# EAGLE board controller v4 (EAGLE 9.7.0)
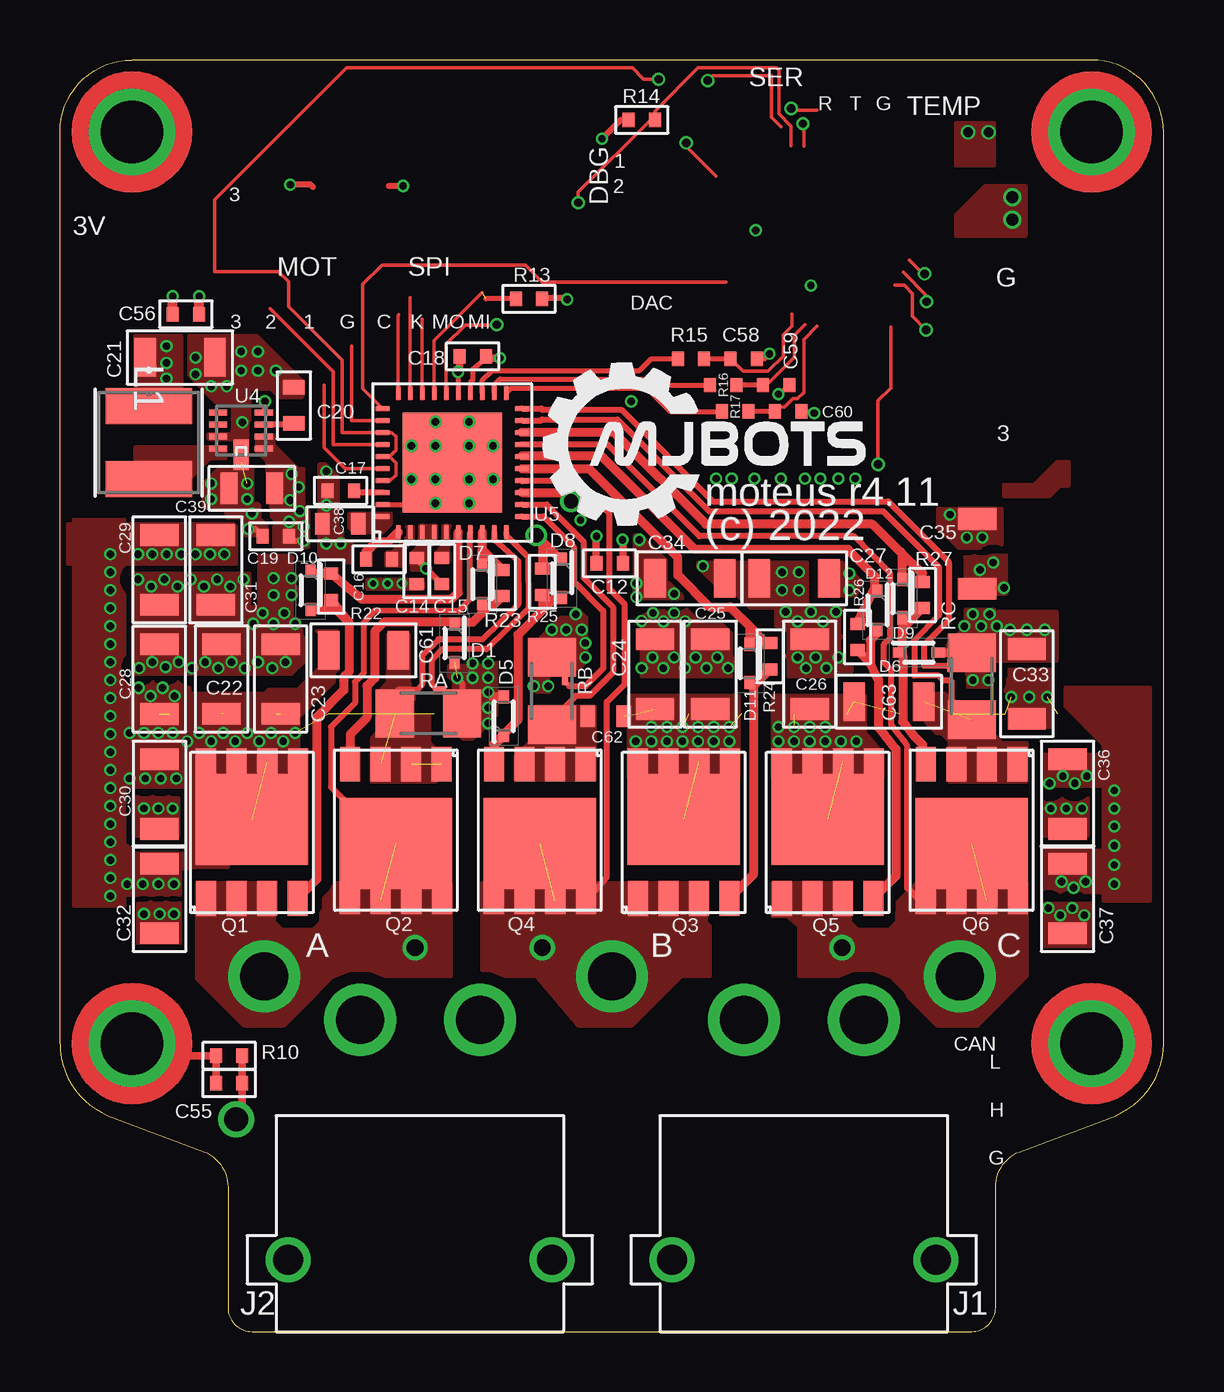
[diagram p0: board, top side]
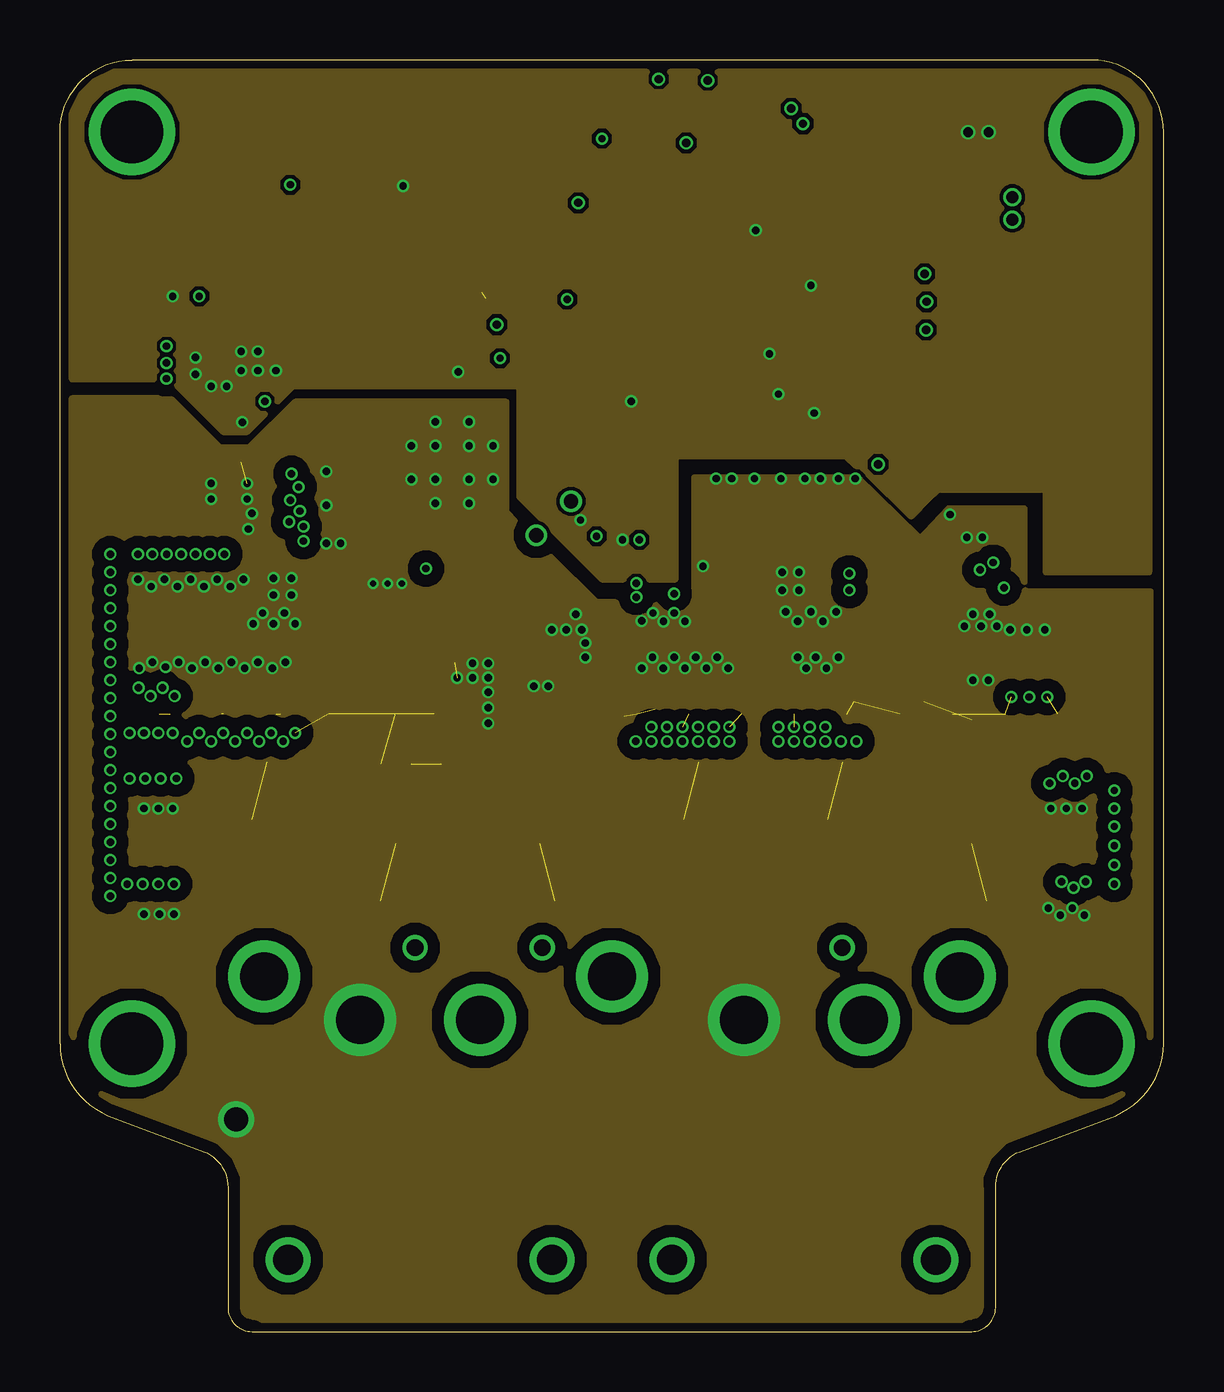
[diagram p1: board, inner layer Route2]
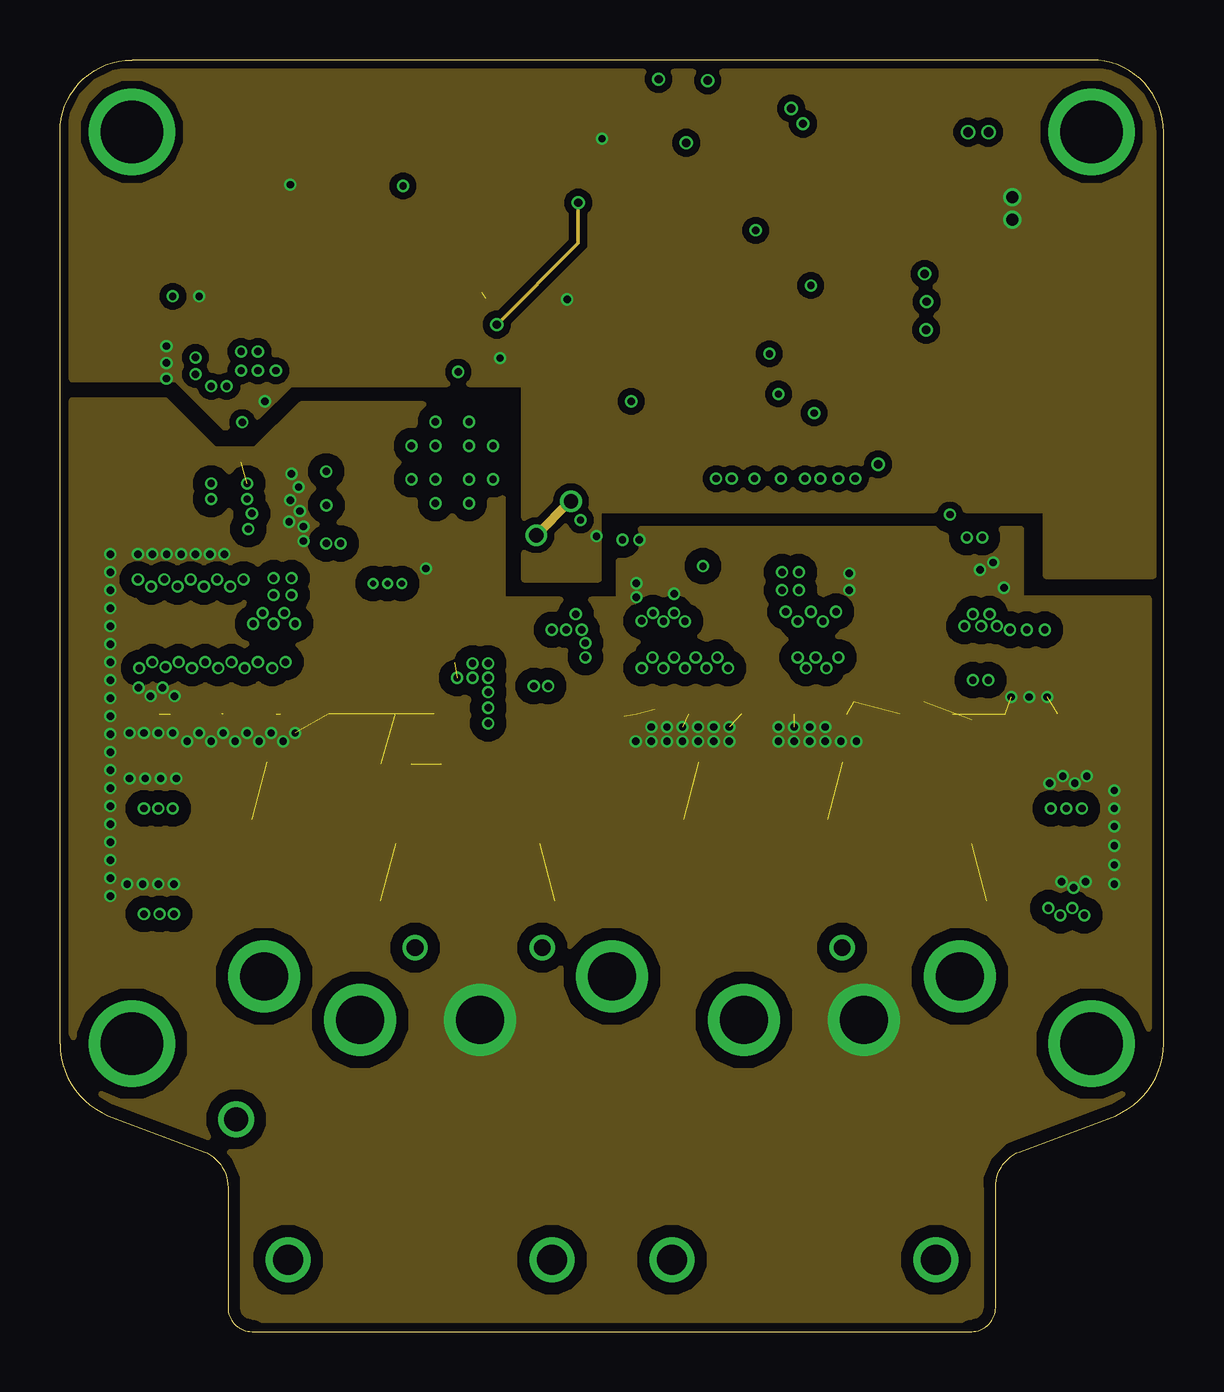
[diagram p2: board, inner layer Route15]
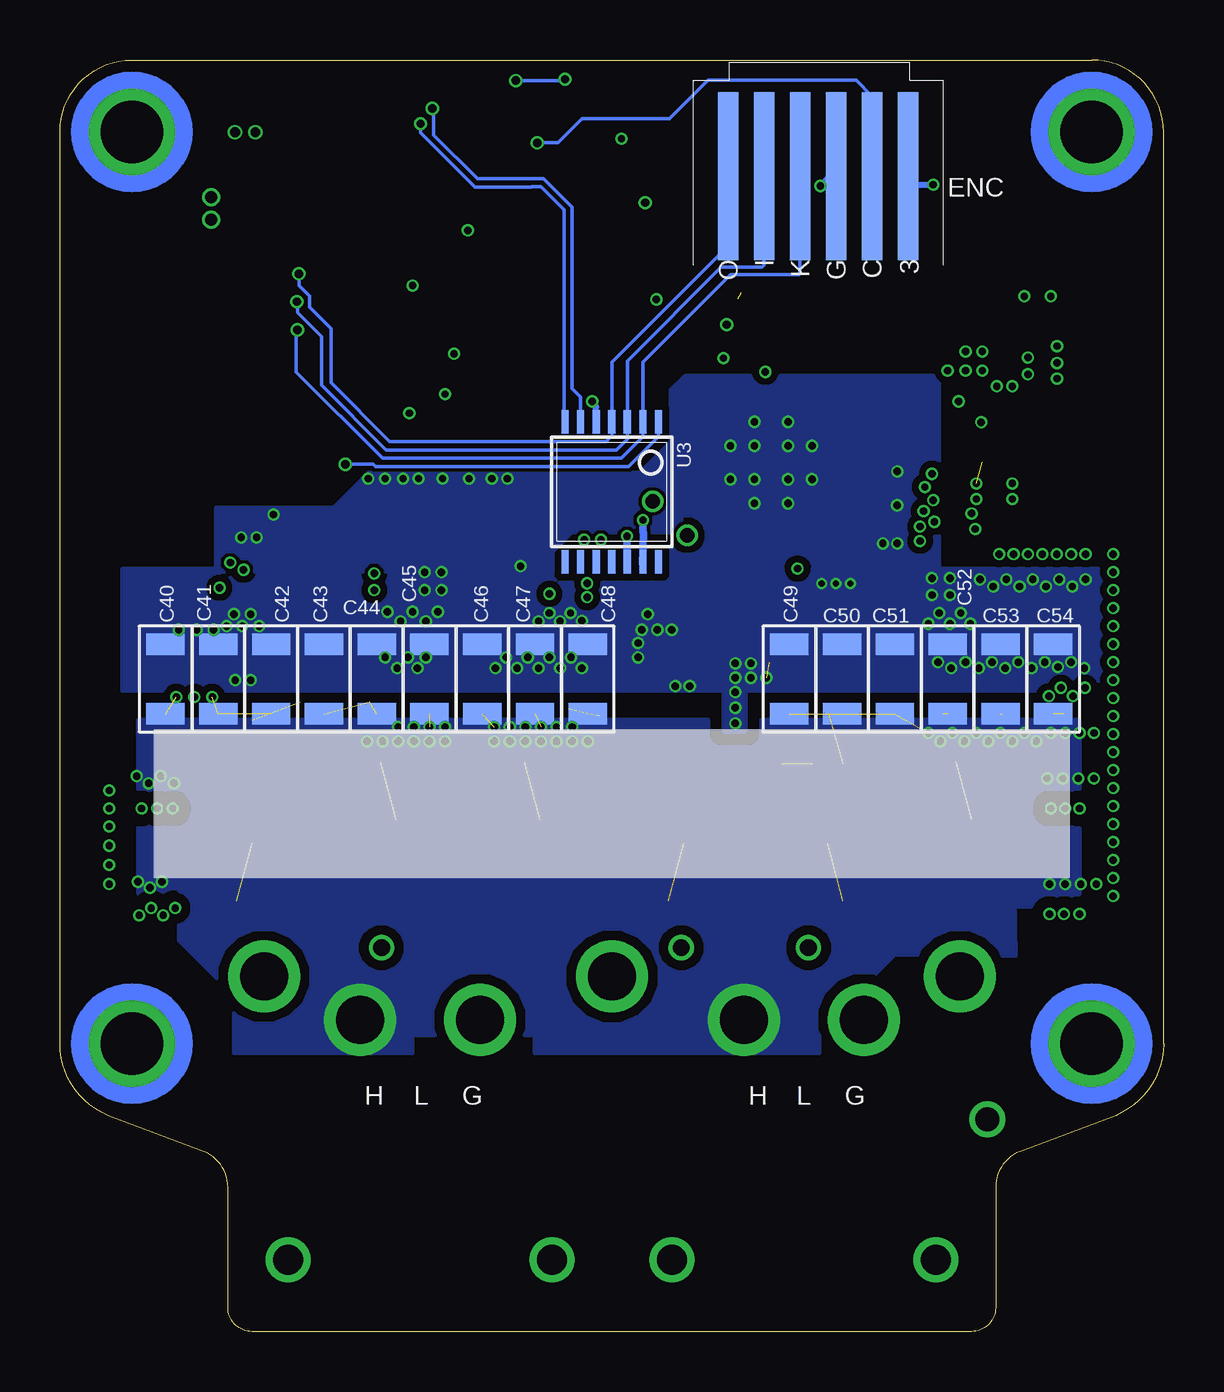
[diagram p3: board, bottom side, seen from below]

Size 46 x 53 mm. Coordinates in mm from the lower left corner, seen from the top.
Outline: 0,12 0,50 arc-90 3,53 43,53 arc-90 46,50 46,12 arc-67 44,9 40,7.5 arc68 39,6 39,1 arc-90 38,0 8,0 arc-90 7,1 7,6 arc68 6,7.5 2,9 arc-67 0,12
Copper layers (1*2*15*16): Top / Route2 / Route15 / Bottom
Stack-up Default Layer Stack: Top User Defined 0.035mm / Dielectric-2 User Defined 0.23mm / Route2 User Defined 0.035mm / Dielectric-1 User Defined 0.93mm / Route15 User Defined 0.035mm / Dielectric-3 User Defined 0.23mm / Bottom User Defined 0.035mm
Design rules "MF_4_mil_drill_4_Layer *": minimum track width 5mil, minimum drill 10mil, track to track 6mil, track to pad 6mil, pad to pad 6mil, via to via 6mil, smd to smd 0mil, copper to edge 10mil, drill to drill 10mil, minimum pad ring 4mil, minimum via ring 4mil, stop-mask expansion 2mil, vias tented up to drill 25mil, thermal gap 10mil
Net classes: 0 default: width 0.127 mm; 1 CAN: width 0.216 mm, clearance 0.127 mm
bKeepout: area 3.9,18.9 to 42.1,25.1

## Footprints (pad centres in the part's own frame; a part is rotated, then mirrored left to right if it is on the bottom)
16AWG_PAD = drill 2: 1 0,0
C0402 = smd 0.5 x 0.6: P$1 -0.55,0; P$2 0.55,0
C0603 = smd 0.6 x 0.9: P$1 -0.75,0; P$2 0.75,0
C1206 = smd 0.9 x 1.6: P$1 -1.45,0; P$2 1.45,0
C1206_NOBORDER = smd 0.9 x 1.6: P$1 -1.45,0; P$2 1.45,0
C0805 = smd 0.7 x 1.3: P$1 -0.95,0; P$2 0.95,0
C1206_NOCREAM = smd 0.9 x 1.6: P$1 -1.45,0; P$2 1.45,0
C0402_NOBORDER = smd 0.5 x 0.6: P$1 -0.55,0; P$2 0.55,0
C0603_NOBORDER = smd 0.6 x 0.9: P$1 -0.75,0; P$2 0.75,0
SODFL1608X70N = smd 0.55 x 0.42: 1 -0.8,0; 2 0.8,0
24AWG_PAD = drill 0.7: P$1 0,0
PICO-SPOX-SMT-RA-6-NOPASTE = smd 0.85 x 7: 1 3.75,0; 2 2.25,0; 3 0.75,0; 4 -0.75,0; 5 -2.25,0; 6 -3.75,0
XT30PW_MALE = drill 2: 1 -2.5,0; 2 2.5,0 | drill 1.25: M1 -5.5,10; M2 5.5,10
IND_BOURNS_SRN4018 = smd 1.499 x 3.607: 1 -1.524,0; 2 1.524,0
M2.5MOUNT = drill 2.6: P$1 0,0
SOP_ADVANCE_8 = smd 0.85 x 1.45: 1 -1.905,-2.95; 2 -0.635,-2.95; 3 0.635,-2.95; 4 1.905,-2.95 | smd 0.85 x 1.1: 5 1.925,2.75; 6 0.637,2.75; 7 -0.637,2.75; 8 -1.925,2.75 | smd 4.7 x 3.8: PAD 0,0.35
R0402 = smd 0.5 x 0.6: P$1 -0.55,0; P$2 0.55,0
R0402_NOBORDER = smd 0.5 x 0.6: P$1 -0.55,0; P$2 0.55,0
M1206 = smd 1.6 x 2: 1 -1.4,0; 2 1.4,0
SHORT_TOP-50 = smd 0.254 x 0.254: 1 0.127,0; 2 -0.127,0
SHORT_TOP-MEDIUM = smd 0.635 x 0.635: 1 0.318,0; 2 -0.318,0
TSSOP14 = smd 0.305 x 0.991: 1 -1.95,-2.918; 2 -1.3,-2.918; 3 -0.65,-2.918; 4 0,-2.918; 5 0.65,-2.918; 6 1.3,-2.918; 7 1.95,-2.918; 8 1.95,2.918; 9 1.3,2.918; 10 0.65,2.918; 11 0,2.918; 12 -0.65,2.918; 13 -1.3,2.918; 14 -1.95,2.918
21-0487A_MXM = smd 0.762 x 0.254: 1 -0.953,0.75; 2 -0.953,0.25; 3 -0.953,-0.25; 4 -0.953,-0.75; 5 0.953,-0.75; 6 0.953,-0.25; 7 0.953,0.25; 8 0.953,0.75
WQFN-40 = smd 0.22 x 0.6: 1 2.25,2.9; 2 1.75,2.9; 3 1.25,2.9; 4 0.75,2.9; 5 0.25,2.9; 6 -0.25,2.9; 7 -0.75,2.9; 8 -1.25,2.9; 9 -1.75,2.9; 10 -2.25,2.9; 21 -2.25,-2.9; 22 -1.75,-2.9; 23 -1.25,-2.9; 24 -0.75,-2.9; 25 -0.25,-2.9; 26 0.25,-2.9; 27 0.75,-2.9; 28 1.25,-2.9; 29 1.75,-2.9; 30 2.25,-2.9 | smd 0.6 x 0.22: 11 -2.9,2.25; 12 -2.9,1.75; 13 -2.9,1.25; 14 -2.9,0.75; 15 -2.9,0.25; 16 -2.9,-0.25; 17 -2.9,-0.75; 18 -2.9,-1.25; 19 -2.9,-1.75; 20 -2.9,-2.25; 31 2.9,-2.25; 32 2.9,-1.75; 33 2.9,-1.25; 34 2.9,-0.75; 35 2.9,-0.25; 36 2.9,0.25; 37 2.9,0.75; 38 2.9,1.25; 39 2.9,1.75; 40 2.9,2.25 | drill 0.305: P1 -0.7,-1.7; P2 0.7,-1.7; P3 1.7,-0.7; P7 0.7,-0.7; P8 0.7,1.7; P9 -0.7,1.7; P12 -0.7,-0.7; P13 0.7,0.7; P14 -0.7,0.7; P17 -1.7,-0.7; P18 1.7,0.7; P19 -1.7,0.7 | smd 4.15 x 4.15: PAD 0,0

## Placement (x,y rotation side)
A  PAD16AWG_PAD  [16AWG_PAD]  8.5,14.8 0 top
B  PAD16AWG_PAD  [16AWG_PAD]  23,14.8 0 top
C  PAD16AWG_PAD  [16AWG_PAD]  37.5,14.8 0 top
C12  0.1uF  [C0402]  22.91,32.02 0 top
C14  0.1uF 50V  [C0402]  14.87,31.7 270 top
C15  1uF  [C0402]  15.91,31.7 90 top
C16  0.1uF 50V  [C0402]  13.3,32.18 180 top
C17  1uF  [C0402]  11.7,35.05 0 top
C18  0.1uF  [C0402]  17.2,40.65 0 top
C19  0.47uF 50V  [C0402]  9,33.15 180 top
C20  1uF  [C0603]  9.75,38.6 90 top
C21  10uF  [C1206]  5,40.6 0 top
C22  10uF 50V  [C1206]  6.73,27.2 90 top
C23  10uF 50V  [C1206]  9.2,27.2 90 top
C24  10uF 50V  [C1206]  24.8,27.4 90 top
C25  10uF 50V  [C1206]  27.1,27.4 90 top
C26  10uF 50V  [C1206]  31.25,27.4 90 top
C27  10uF 50V  [C1206]  26.25,31.4 0 top
C28  10uF 50V  [C1206]  4.14,27.19 90 top
C29  10uF 50V  [C1206]  4.14,31.75 270 top
C30  10uF 50V  [C1206]  4.15,22.4 270 top
C31  10uF 50V  [C1206]  6.5,31.75 270 top
C32  10uF 50V  [C1206]  4.15,18.05 270 top
C33  10uF 50V  [C1206]  40.3,27 90 top
C34  10uF 50V  [C1206]  30.6,31.4 180 top
C35  10uF 50V  [C1206_NOBORDER]  38.23,32.41 90 top
C36  10uF 50V  [C1206]  42,22.4 270 top
C37  10uF 50V  [C1206]  42,18.05 270 top
C38  1uF  [C0603]  11.69,33.67 0 top
C39  1uF 100V  [C0805]  8,35.15 180 top
C40  DNP  [C1206_NOCREAM]  41.6,27.2 90 bottom
C41  DNP  [C1206_NOCREAM]  39.4,27.2 90 bottom
C42  DNP  [C1206_NOCREAM]  37.2,27.2 90 bottom
C43  DNP  [C1206_NOCREAM]  35,27.2 90 bottom
C44  DNP  [C1206_NOCREAM]  32.8,27.2 90 bottom
C45  DNP  [C1206_NOCREAM]  30.6,27.2 90 bottom
C46  DNP  [C1206_NOCREAM]  28.4,27.2 90 bottom
C47  DNP  [C1206_NOCREAM]  26.2,27.2 90 bottom
C48  DNP  [C1206_NOCREAM]  24,27.2 90 bottom
C49  DNP  [C1206_NOCREAM]  15.6,27.2 90 bottom
C50  DNP  [C1206_NOCREAM]  13.4,27.2 90 bottom
C51  DNP  [C1206_NOCREAM]  11.2,27.2 90 bottom
C52  DNP  [C1206_NOCREAM]  9,27.2 90 bottom
C53  DNP  [C1206_NOCREAM]  6.8,27.2 90 bottom
C54  DNP  [C1206_NOCREAM]  4.6,27.2 90 bottom
C55  DNP  [C0402]  7.05,10.35 0 top
C56  1uF  [C0402]  5.25,42.4 180 top
C58  1000pF  [C0402_NOBORDER]  28.5,40.55 0 top
C59  1000pF  [C0402_NOBORDER]  29.85,39.45 0 top
C60  1000pF  [C0402_NOBORDER]  30.35,38.35 0 top
C61  0.1uF 50V  [C1206]  12.65,28.4 0 top
C62  0.1uF 50V  [C0603_NOBORDER]  22.75,25.65 180 top
C63  0.1uF 50V  [C1206]  34.55,26.25 0 top
D1  BAT41KFILM  [SODFL1608X70N]  16.45,28.69 270 top
D5  BAT41KFILM  [SODFL1608X70N]  18.5,25.65 90 top
D6  BAT41KFILM  [SODFL1608X70N]  35.8,28.3 0 top
D7  BAT41KFILM  [SODFL1608X70N]  17.6,31.15 270 top
D8  BAT41KFILM  [SODFL1608X70N]  20.93,31.4 270 top
D9  BAT41KFILM  [SODFL1608X70N]  35.11,30.55 270 top
D10  BAT41KFILM  [SODFL1608X70N]  10.45,30.9 270 top
D11  BAT41KFILM  [SODFL1608X70N]  28.75,27.85 270 top
D12  BAT41KFILM  [SODFL1608X70N]  34.07,30.06 270 top
DA  PAD24AWG_PAD  [24AWG_PAD]  14.8,16 0 top
DB  PAD24AWG_PAD  [24AWG_PAD]  20.1,16 0 top
DC  PAD24AWG_PAD  [24AWG_PAD]  32.6,16 0 top
ENC  PICO-SPOX-6NOPASTE  [PICO-SPOX-SMT-RA-6-NOPASTE]  14.4,48.15 0 bottom
J1  XT30XT30PW_MALE  [XT30PW_MALE]  31,13 180 top
J2  XT30XT30PW_MALE  [XT30PW_MALE]  15,13 180 top
L1  SRN4018-220M  [IND_BOURNS_SRN4018]  3.7,37.05 270 top
M1  MOUNT  [M2.5MOUNT]  3,50 0 top
M2  MOUNT  [M2.5MOUNT]  43,50 0 top
M3  MOUNT  [M2.5MOUNT]  3,12 0 top
M4  MOUNT  [M2.5MOUNT]  43,12 0 top
Q1  TPH1R204PLSOP_ADVANCE_8  [SOP_ADVANCE_8]  8,21 0 top
Q2  TPH1R204PLSOP_ADVANCE_8  [SOP_ADVANCE_8]  14,20.7 180 top
Q3  TPH1R204PLSOP_ADVANCE_8  [SOP_ADVANCE_8]  26,21 0 top
Q4  TPH1R204PLSOP_ADVANCE_8  [SOP_ADVANCE_8]  20,20.7 180 top
Q5  TPH1R204PLSOP_ADVANCE_8  [SOP_ADVANCE_8]  32,21 0 top
Q6  TPH1R204PLSOP_ADVANCE_8  [SOP_ADVANCE_8]  38,20.7 180 top
R10  DNP  [R0402]  7.05,11.5 0 top
R13  2k  [R0402]  19.55,43.05 180 top
R14  2k  [R0402]  24.25,50.5 0 top
R15  22  [R0402_NOBORDER]  26.3,40.55 0 top
R16  22  [R0402_NOBORDER]  27.65,39.45 0 top
R17  22  [R0402_NOBORDER]  28.15,38.35 0 top
R22  7.5  [R0402]  11.3,31.05 270 top
R23  7.5  [R0402]  18.45,31.2 270 top
R24  7.5  [R0402]  29.6,28.15 270 top
R25  7.5  [R0402]  20.11,31.25 270 top
R26  7.5  [R0402]  33.24,28.95 270 top
R27  7.5  [R0402]  35.95,30.7 270 top
RA  0.5mOhm 1% 2W  [M1206]  15.36,25.77 180 top
RB  0.5mOhm 1% 2W  [M1206]  20.5,26.7 270 top
RC  0.5mOhm 1% 2W  [M1206]  38,26.9 270 top
SH1  SHORTT5  [SHORT_TOP-50]  15.84,26.75 180 top
SH2  SHORTT5  [SHORT_TOP-50]  21.05,27.21 270 top
SH3  SHORTT5  [SHORT_TOP-50]  37.12,27.77 270 top
SH4  SHORTMEDIUM  [SHORT_TOP-MEDIUM]  7.55,36.55 270 top
U3  AS5147  [TSSOP14]  23,35 180 bottom
U4  MAX15062AATA+T  [21-0487A_MXM]  7.55,37.55 180 top
U5  DRV8353S  [WQFN-40]  16.35,36.22 180 top

## Library data of the parts
A B C C40-C54 DA DB DC ENC M1-M4 = controller; POPULATE: 0
C12 C18 = mfpassives; HOUSEPART: YES; MPN: MF-CAP-0402-0.1uF; POPULATE: 1
C14 C16 = mfpassives; MF: TDK; MPN: CGA2B3X7R1H104K050BB; POPULATE: 1
C15 C17 C56 = mfpassives; HOUSEPART: YES; MPN: MF-CAP-0402-1uF; POPULATE: 1
C19 = mfpassives; MF: Murata; MPN: GRM155R61H474KE11D; POPULATE: 1
C20 = mfpassives; HOUSEPART: 1; MPN: MF-CAP-0603-1uF; POPULATE: 1
C21 = mfpassives; HOUSEPART: 1; MPN: MF-CAP-1206-10uF; POPULATE: 1
C22-C34 C36 C37 = mfpassives; MF: TDK; MPN: C3216X7R1H106K160AE; POPULATE: 1
C35 = controller; MF: TDK; MPN: C3216X7R1H106K160AE; POPULATE: 1
C38 = mfpassives; HOUSEPART: YES; MF: TDK; MPN: C1608X7R1E105K080AE; POPULATE: 1
C39 = mfpassives; MF: MURATA; MPN: GCM21BC72A105KE36L; POPULATE: 1
C55 R10 = mfpassives; POPULATE: 0
C58-C60 = controller; HOUSEPART: 1; MPN: MF-CAP-0402-1nF; POPULATE: 1
C61 C63 = mfpassives; MF: KYOCERA AVX; MPN: 12065C104KAZ2A; POPULATE: 1
C62 = controller; MF: KYOCERA AVX; MPN: 06035C104KAZ2A; POPULATE: 1
D1 D5-D12 = BAT41KFILM; DESCRIPTION: STMicroelectronics 100V 200mA, Diode, 2-Pin SOD-523 BAT41KFILM; HEIGHT: 0.7mm; MANUFACTURER_NAME: STMicroelectronics; MANUFACTURER_PART_NUMBER: BAT41KFILM; MF: ST; MOUSER_PART_NUMBER: 511-BAT41KFILM; MOUSER_PRICE-STOCK: https://www.mouser.co.uk/ProductDetail/STMicroelectronics/BAT41KFILM?qs=jZi1jxfVU94ZzsUNeiIqGg%3D%3D; MPN: BAT41KFILM; POPULATE: 1
J1 J2 = controller; POPULATE: 1
L1 = controller; ALT2_MF: WURTH; ALT2_MPN: 74404042330; ALT_MPN: SRN4026-330M; MANUFACTURER_PART_NUMBER: SRN4018-330M; MPN: SRN4018-330M; POPULATE: 1; VENDOR: Bourns Electronics
Q1-Q6 = controller; MF: Toshiba; MPN: TPH2R506PL,L1Q; POPULATE: 1
R13 R14 = mfpassives; HOUSEPART: YES; MPN: MF-RES-0402-2K; POPULATE: 1
R15-R17 = controller; HOUSEPART: 1; MPN: MF-RES-0402-22; POPULATE: 1
R22-R27 = mfpassives; HOUSEPART: 1; MPN: RC0402FR-077R5L; POPULATE: 1
RA RB RC = rcl; MF: Stackpole Electronics; MPN: HCS1206FTL500; POPULATE: 1
SH1-SH3 = shorts; BOM: no; POPULATE: 0
SH4 = shorts; POPULATE: 0
U3 = controller; MF: AMS; MPN: AS5047P-ATSM; POPULATE: 1
U4 = power_dist; BUILT_BY: EMA_Jessica; COPYRIGHT: Copyright (C) 2018 Accelerated Designs. All rights reserved; MANUFACTURER_PART_NUMBER: MAX15062AATA+T; MPN: MAX15062AATA+T; POPULATE: 1; REVISION: 1; SOURCELIBRARY: Maxim_DP_2018-06-12; VENDOR: Maxim Integrated Products
U5 = controller; MF: TI; MPN: DRV8353FSRTAR; POPULATE: 1

## Nets
+3V3: C12.P$1 C18.P$2 C21.P$1 C56.P$1 ENC.1 L1.1 R13.P$1 R14.P$1 U3.12 U4.4 U5.24
AS5047_A: U3.7
AS5047_B: U3.6
AS5047_CS: U3.1
AS5047_MISO: ENC.5 U3.3
AS5047_MOSI: ENC.6 U3.4
AS5047_SCK: ENC.4 U3.2
CUR1: R15.P$1 U5.23
CUR2: R16.P$1 U5.22
CUR3: R17.P$1 U5.21
DRV8323_CS: U5.30
DRV8323_MISO: R13.P$2 U5.27
DRV8323_MOSI: U5.28
DRV8323_SCLK: U5.29
FCUR1: C58.P$1 R15.P$2
GHA: D10.1 R22.P$1 U5.6
GHA_D: D10.2 Q1.4 R22.P$2
GHB: D11.1 R24.P$1 U5.15
GHB_D: D11.2 Q3.4 R24.P$2
GHC: D12.1 R26.P$1 U5.16
GHC_D: D12.2 Q5.4 R26.P$2
GLA: D7.1 R23.P$1 U5.8
GLA_D: D1.1 D7.2 Q2.4 R23.P$2
GLB: D8.1 R25.P$1 U5.13
GLB_D: D5.1 D8.2 Q4.4 R25.P$2
GLC: D9.1 R27.P$1 U5.18
GLC_D: D6.1 D9.2 Q6.4 R27.P$2
GND: C12.P$2 C18.P$1 C20.P$2 C21.P$2 C56.P$2 C58.P$2 C59.P$2 C60.P$2 ENC.3 SH4.2 U3.5 U3.13 U4.7 U5.25
MOTOR1: U5.32
MOTOR2: U5.34
MOTOR3: U5.36
MOTOR_ENABLE: U5.31
MOTOR_FAULT: R14.P$2 U5.26
MOTOR_HIZ: U5.33 U5.35 U5.37
N$1: C55.P$1 M3.P$1 R10.P$1
N$2: C38.P$2 U5.40
N$4: C20.P$1 U4.3
N$7: C59.P$1 R16.P$2
N$8: C60.P$1 R17.P$2
N$10: C16.P$2 U5.1
N$13: C16.P$1 U5.2
N$14: C15.P$2 U5.5
N$16: C17.P$2 U5.38
SECONDARY_ENC_CS: ENC.2
SHA: A.1 DA.P$1 Q1.1 Q1.2 Q1.3 Q2.5 Q2.6 Q2.7 Q2.8 Q2.PAD U5.7
SHB: B.1 DB.P$1 Q3.1 Q3.2 Q3.3 Q4.5 Q4.6 Q4.7 Q4.8 Q4.PAD U5.14
SHC: C.1 DC.P$1 Q5.1 Q5.2 Q5.3 Q6.5 Q6.6 Q6.7 Q6.8 Q6.PAD U5.17
SXA_N: SH1.1 U5.10
SXA_P: C61.P$2 Q2.1 Q2.2 Q2.3 RA.2 U5.9
SXB_N: SH2.1 U5.11
SXB_P: C62.P$2 Q4.1 Q4.2 Q4.3 RB.2 U5.12
SXC_N: SH3.1 U5.20
SXC_P: C63.P$2 Q6.1 Q6.2 Q6.3 RC.2 U5.19
V+: C14.P$1 C15.P$1 C19.P$1 C22.P$1 C23.P$1 C24.P$1 C25.P$1 C26.P$1 C27.P$1 C28.P$1 C29.P$1 C30.P$1 C31.P$1 C32.P$1 C33.P$1 C34.P$1 C35.P$1 C36.P$1 C37.P$1 C39.P$1 C40.P$1 C41.P$1 C42.P$1 C43.P$1 C44.P$1 C45.P$1 C46.P$1 C47.P$1 C48.P$1 C49.P$1 C50.P$1 C51.P$1 C52.P$1 C53.P$1 C54.P$1 C61.P$1 C62.P$1 C63.P$1 J1.1 J2.1 Q1.5 Q1.6 Q1.7 Q1.8 Q1.PAD Q3.5 Q3.6 Q3.7 Q3.8 Q3.PAD Q5.5 Q5.6 Q5.7 Q5.8 Q5.PAD U4.1 U4.2 U5.3 U5.4
V-: C14.P$2 C17.P$1 C19.P$2 C22.P$2 C23.P$2 C24.P$2 C25.P$2 C26.P$2 C27.P$2 C28.P$2 C29.P$2 C30.P$2 C31.P$2 C32.P$2 C33.P$2 C34.P$2 C35.P$2 C36.P$2 C37.P$2 C38.P$1 C39.P$2 C40.P$2 C41.P$2 C42.P$2 C43.P$2 C44.P$2 C45.P$2 C46.P$2 C47.P$2 C48.P$2 C49.P$2 C50.P$2 C51.P$2 C52.P$2 C53.P$2 C54.P$2 C55.P$2 D1.2 D5.2 D6.2 J1.2 J2.2 R10.P$2 RA.1 RB.1 RC.1 SH1.2 SH2.2 SH3.2 SH4.1 U5.39 U5.P1 U5.P2 U5.P3 U5.P7 U5.P8 U5.P9 U5.P12 U5.P13 U5.P14 U5.P17 U5.P18 U5.P19 U5.PAD
VSW: L1.2 U4.8

## Tracks (layer width: path | path; a pad name or v marks a point on that pad's centre or on a via)
+3V3  (via drill 0.3, 0.5)
  Top 0.216: U5.24 17.1,39.55 17.2,39.65 17.2,40.1 17.75,40.55 C18.P$2
  Top 0.254: 10.55,47.7 10.46,47.79 10.46,47.8 v9.6,47.8 | R14.P$1 23.37,50.5 v22.59,49.72 | R13.P$1 20.08,43.07 21.09,43.07 v21.14,43.02 | U4.4 8.54,38.34 v8.54,38.77
  Top 0.305: C12.P$1 22.35,33.14 v22.36,33.15 | C18.P$2 17.83,40.57 v18.34,40.57
  Top 0.406: C56.P$1 v5.8,43.15
  Bottom 0.254: ENC.1 10.3,47.8 v9.6,47.8
  Bottom 0.305: U3.12 22.36,32.1 v22.36,33.15
  other vias: 39.7,46.34 39.7,47.29 4.44,41.07 4.44,40.37 4.44,39.72
  pour Route15 (isolate 0.3, no thermals): 22.58,34.12 40.97,34.12 40.97,31.37 45.73,31.37 45.73,52.63 0.37,52.63 0.37,39.57 4.8,39.57 6.8,37.57 7.85,37.57 9.65,39.37 19.22,39.37 19.22,31.22 22.58,31.22
  pour Top (no thermals): 40.31,47.81 38.52,47.81 37.29,46.58 37.29,45.59 40.31,45.59
  pour Top (no thermals): 5.13,41.58 3.07,41.58 3.07,38.57 5.13,38.57
  pour Top (no thermals): 41.73,35.19 42.11,35.19 42.11,36.31 41.52,36.31 40.57,35.36 39.29,35.36 39.29,34.74 41.28,34.74
AS5047_A  (via drill 0.35)
  Top 0.152: 31,49.4 31,50.34 v30.97,50.34
  Bottom 0.127: 25,38 U3.7
  Bottom 0.152: v30.97,50.34 30.97,49.97 28.7,47.7 26.36,47.7 26.35,47.71 25.95,47.71 25,46.76 25,38
AS5047_B  (via drill 0.35)
  Top 0.152: 31.55,50.9 30.56,50.9 v30.48,50.98
  Bottom 0.152: v30.48,50.98 30.48,50.96 30.42,50.9 30.42,49.87 28.6,48.05 25.84,48.05 24.65,46.86 24.65,39.3 24.3,38.95 U3.6
AS5047_CS  (via drill 0.35)
  Top 0.152: v34.1,36.15 34.1,38.8 34.63,39.33 34.63,41.87
  Bottom 0.152: U3.1 21.05,37.3 22.3,36.05 32.85,36.05 32.95,36.15 v34.1,36.15
AS5047_MISO  (via drill 0.35)
  Top 0.152: v36.12,42.92 36.12,43.18 35.15,44.15
  Bottom 0.152: v36.12,42.92 36.1,42.91 36.1,42.47 35.1,41.47 35.1,39.45 32.4,36.75 22.8,36.75 22.35,37.2 U3.3 22.35,40.45 18.44,44.36 16.74,44.36 16.65,44.45 ENC.5
AS5047_MOSI  (via drill 0.35)
  Top 0.152: v36.04,44.09 35.96,44.09 35.4,44.65
  Bottom 0.152: v36.04,44.09 36.04,43.59 35.6,43.15 35.6,42.7 34.7,41.8 34.7,39.55 32.26,37.1 23.25,37.1 23,37.35 U3.4 23,40.4 18.15,45.25 ENC.6
AS5047_SCK  (via drill 0.35)
  Top 0.152: 34.79,43.61 35.19,43.61 35.53,43.27 35.53,42.31 v36.1,41.75
  Bottom 0.152: v36.1,41.75 36.15,41.7 36.15,40 32.55,36.4 22.6,36.4 21.7,37.3 U3.2 21.7,40.4 18.05,44.05 15.2,44.05 15.15,44.1 ENC.4
CUR1
  Top 0.203: U5.23 17.6,39.65 18.01,40.06 24.16,40.06 24.65,40.55 R15.P$1
CUR2
  Top 0.203: U5.22 18.1,39.45 18.35,39.7 25,39.7 25.25,39.45 R16.P$1
CUR3
  Top 0.203: U5.21 18.79,39.31 24.49,39.31 25.45,38.35 R17.P$1
DRV8323_CS
  Top 0.152: U5.30 14.1,42.35 14.12,42.38
DRV8323_MISO  (1 unrouted)
  Top 0.152: 17.6,43.3 15.6,41.3 U5.27
  Top 0.216: R13.P$2 17.75,43.05
DRV8323_MOSI
  Top 0.152: U5.28 15.1,42.2
DRV8323_SCLK
  Top 0.152: U5.29 14.6,43.1
FCUR1
  Top 0.152: C58.P$1 28.48,40.02 29.52,40.02 30.15,40.65 30.15,41.55 30.5,41.9 30.5,42.4
  Top 0.203: R15.P$2 C58.P$1
GHA
  Top 0.381: U5.6 16.6,30.8 16.31,30.52 12.73,30.52 12.59,30.52 R22.P$1 10.55,31.6 D10.1
GHA_D
  Top 0.381: R22.P$2 12.05,29.55 | Q1.4 10.7,18.84 10.7,25.6 11.83,26.73 11.83,27.28 12.05,27.5 12.05,29.55 | D10.2 11.5,30.1 12.05,29.55
GHB
  Top 0.33: 19.27,35.95 U5.15
  Top 0.381: 19.27,35.95 22.07,35.95 25.75,32.27 25.75,31.53 27.08,30.2 27.93,30.2 28.75,29.38 | 28.75,29.38 29.43,28.7 R24.P$1 | D11.1 28.75,29.38
GHB_D
  Top 0.381: R24.P$2 28.9,26.9 | 28.9,26.9 28.9,19.05 Q3.4 | D11.2 28.9,26.9
GHC
  Top 0.33: 19.27,36.49 U5.16
  Top 0.381: 19.27,36.49 22.57,36.49 26.46,32.6 32.85,32.6 33.95,31.5 33.95,30.99 | 33.95,30.99 33.24,29.6 R26.P$1 | D12.1 33.95,30.98 33.95,30.99
GHC_D
  Top 0.381: R26.P$2 33.75,27.89 33.78,27.84 | 33.78,27.84 34.08,27.21 34.13,27.16 34.13,25.17 34.85,24.26 | 34.85,24.26 | Q5.4 34.85,19 34.85,24.26 | D12.2 34.07,29.11 33.78,28.82 33.78,27.84
GLA
  Top 0.381: U5.8 D7.1 17.6,32.59 R23.P$1
GLA_D
  Top 0.381: 16.63,29.57 17.21,29.57 17.75,30.11 17.75,30.2 | 16.63,29.57 16.55,29.57 13.52,29.57 13.12,29.17 13.12,27.23 12.8,26.91 12.8,25.6 12.1,24.89 Q2.4 | D1.1 16.53,29.57 16.62,29.57 16.63,29.57 | D7.2 17.75,30.2 | 17.75,30.2 18,30.2 R23.P$2
GLB  (via drill 0.6)
  Top 0.381: U5.13 20.93,34.97 v21.3,34.61 | v19.86,33.19 20.11,32.94 | 20.11,32.94 R25.P$1 | D8.1 20.84,32.2 20.11,32.94
  Route15 0.381: v19.86,33.19 19.86,33.2 21.25,34.61 v21.3,34.61
GLB_D
  Top 0.381: R25.P$2 20.11,30.06 | 20.11,30.06 19.09,29.04 19.09,25.48 18.09,24.5 Q4.4 18.09,24.45 D5.1 | D8.2 20.64,30.6 20.11,30.06
GLC
  Top 0.381: U5.18 23.1,37.47 26.92,33.65 33.86,33.65 35.04,32.49 | R27.P$1 35.95,31.6 35.04,32.49 | D9.1 35.11,32.42 35.04,32.49
GLC_D
  Top 0.381: 35.55,24.89 35.67,24.74 35.96,24.45 35.96,23.79 Q6.4 | 35.55,24.89 | 35.55,24.89 35.3,25.21 35.27,25.24 35.13,25.42 35.13,28.16 D6.1 35.1,28.4 35.1,29.3 35.11,29.31 | R27.P$2 35.11,29.31 | D9.2 35.11,29.31
GND  (via drill 0.3, 0.4)
  Top 0.203: C58.P$2 29.37,40.55 v29.57,40.76 | C59.P$2 30.02,39.08 v29.95,39.08 | C60.P$2 31.38,38.35 v31.44,38.28
  Top 0.216: v16.6,40 U5.25
  Top 0.254: v14.3,47.75 13.7,47.75
  Top 0.305: v23.45,33 v23.46,32.99 C12.P$2 | C20.P$2 9.45,39.35 | C18.P$1 16.65,40.05 v16.6,40
  Top 0.406: C56.P$2 v4.7,43.15
  Bottom 0.254: U3.5 23.65,38.55 23.81,38.71 v23.81,38.77 | ENC.3 13.9,48.15 v14.3,47.75
  Bottom 0.305: U3.13 21.72,32 21.68,33.3 21.7,33.33 v21.7,33.82
  other vias: 38.7,49.99 37.85,49.99 29,45.9 31.3,43.6 5.65,39.9 6.3,39.4 6.95,39.4 7.6,37.9 5.65,40.6 7.55,40.85 7.55,40.05 8.25,40.85 8.25,40.05 9,40.05
  pour Route2 (rank 2, no thermals): 25.78,36.37 32.7,36.37 35.4,33.72 35.54,33.86 36.29,34.61 36.65,34.97 40.95,34.97 40.97,34.95 40.97,31.52 45.53,31.52 45.53,52.63 0.37,52.63 0.37,39.57 4.55,39.57 6.75,37.37 7.85,37.37 9.75,39.27 19.02,39.27 19.02,34.75 22.55,31.22 25.78,31.22
  pour Top (no thermals): 39.01,50.45 37.29,50.45 37.29,48.53 39.01,48.53
  pour Top (no thermals): 7.88,38.18 7.12,38.18 7.12,37.48 6.12,37.48 6.12,37.12 7.22,37.12 7.22,36.72 7.88,36.72
  pour Top (no thermals): 7.98,40.22 8.23,40.47 8.23,41.58 5.32,41.58 5.32,39.82 6.42,38.72 7.98,38.72
  pour Top (no thermals): 7.98,38.75 7.58,39.15 7.58,39.38 5.97,39.38 5.9,39.22 6.45,38.67 7.05,38.67 7.12,38.6 7.12,37.87 7.98,37.87
  pour Top (no thermals): 10.18,39.63 8.2,41.61 6.77,40.18 6.77,39.82 7.37,39.22 8.77,39.22 9.12,38.87 10.18,38.87
MOTOR1
  Top 0.152: U5.32 12.16,37.97 12.16,41.08
MOTOR2
  Top 0.152: U5.34 11.38,36.97 11.38,40.02 8.75,42.65
MOTOR3
  Top 0.152: U5.36 11.88,35.97 11,36.85 11,39.45
MOTOR_ENABLE
  Top 0.152: 27.75,43.75 20.1,43.75 19.4,44.45 13.42,44.45 12.62,43.65 12.62,39.3 U5.31
MOTOR_FAULT  (via drill 0.35)
  Top 0.127: 24.62,50.5 R14.P$2
  Top 0.152: U5.26 16.1,41.15 16.9,41.95 18.21,41.95 v18.21,41.97 | 24.62,50.5 21.6,47.48 v21.6,47.05 | 30.47,49.43 30.47,50.25 29.97,50.75 29.97,52.57 29.87,52.67 26.6,52.67 24.8,50.87 R14.P$2
  Route15 0.152: v18.21,41.97 21.6,45.36 v21.6,47.05
MOTOR_HIZ  (via drill 0.35)
  Top 0.152: U5.37 13.77,35.47 14,35.7 14,36.2 13.73,36.47 | 13.73,36.47 U5.35 | 13.73,36.47 14,36.74 14,37.3 13.83,37.47 U5.33 11.76,37.47 11.76,40.48 9.53,42.71 9.53,43.75 9.1,44.18 6.45,44.18 6.45,47.17 11.95,52.67 23.86,52.67 24.33,52.2 v24.95,52.2 | 30.05,50.23 29.66,50.62 29.66,52.33 29.65,52.34 27.2,52.34 v27,52.14
  Bottom 0.152: v27,52.14 25.16,52.14 25.1,52.2 v24.95,52.2
N$1
  Top 0.305: M3.P$1 3.5,11.5 R10.P$1 C55.P$1
N$2
  pour Top (no thermals): 13.86,33.62 13.86,34.16 11.99,34.16 11.99,33.47 12.22,33.24 13.48,33.24
N$4
  Top 0.203: C20.P$1 9.7,37.8
  Top 0.254: 9.7,37.8 U4.3
N$7
  Top 0.152: C59.P$1 29.45,39.45 30.61,40.61 30.61,41.52 31.05,41.97
  Top 0.203: C59.P$1 R16.P$2
N$8
  Top 0.152: C60.P$1 29.98,38.53 30.2,38.53 30.55,38.88 30.75,38.88 31,39.13 31,41.35 31.55,41.9
  Top 0.203: C60.P$1 R17.P$2
N$10
  Top 0.381: U5.1 13.68,32.9 13.15,32.9 12.75,32.5 C16.P$2
N$13
  pour Top (rank 2, no thermals): 14.36,32.52 14.73,32.89 14.81,32.89 14.81,33.61 14.39,33.61 14.39,33.18 13.87,32.66 13.72,32.66 13.54,32.48 13.54,31.84 14.36,31.84
N$14
  pour Top (rank 2, no thermals): 16.31,33.66 15.89,33.66 15.89,32.78 15.59,32.48 15.59,31.99 16.31,31.99
N$16
  Top 0.254: C17.P$2 12.33,34.97 U5.38
SECONDARY_ENC_CS  (via drill 0.35)
  Top 0.152: v26.1,49.55 26.1,49.4 27.35,48.15
  Bottom 0.152: v26.1,49.55 25.25,49.55 24.25,50.55 20.6,50.55 19,52.15 12.8,52.15 12.15,51.5 ENC.2
SHA  (1 unrouted)
  Top 0.254: Q2.PAD 13.65,20.35 11.3,22.7 11.3,25.2 12.3,26.2 12.3,27.08 12.65,27.43 12.65,29.53 13.11,30.05 16.62,30.04 17.1,30.53 U5.7
  pour Top (isolate 0.5, no thermals): 11.43,14.74 16.36,14.74 16.36,18.76 10.94,18.76 10.94,17.63 10.47,17.16 9.33,17.16 9.16,17.33 9.16,18.76 5.64,18.76 5.64,14.67 7.62,12.69 9.38,12.69
SHB  (1 unrouted)
  Top 0.254: Q4.8 22.8,18.95 22.8,26.25 23.55,27 23.55,30.3 22.9,30.95 22.9,34.1 21.56,35.44 19.28,35.44 U5.14
  pour Top (isolate 0.5, no thermals): 25.93,14.74 27.16,14.74 27.16,18.76 17.54,18.76 17.54,14.74 19.82,14.74 21.54,12.69 23.88,12.69
SHC  (1 unrouted)
  Top 0.254: Q6.5 35.85,17.95 35.32,18.48 35.32,24.43 34.65,25.27 34.65,27.58 34.35,27.88 34.35,28.65 34.61,28.91 34.61,31.59 33.1,33.15 26.65,33.15 22.83,36.97 U5.17
  pour Top (isolate 0.5, no thermals): 40.36,14.77 40.36,18.76 35.67,18.76 34.84,17.93 34.84,17.53 34.47,17.16 33.16,17.16 33.16,18.76 29.64,18.76 29.64,17.24 30.28,17.24 30.74,16.87 30.74,14.74 34.47,14.74 36.52,12.69 38.28,12.69
SXA_N
  Top 0.254: U5.10 18.6,33.2 19.52,32.28 19.53,30.16 17.78,28.44 15.94,28.44 15.5,28 15.5,26.95 SH1.1
SXA_P  (2 unrouted)
  Top 0.254: U5.9 18.1,33.01 19.1,32.11 19.11,30.32 17.6,28.85 15.78,28.85 15.09,28.17 15.09,26.94 14.9,26.75 14.1,26.75 14.1,25.77 RA.2
  pour Top (isolate 0.5, no thermals): 15.71,25.76 12.94,25.76 12.94,22.84 15.71,22.84
  pour Top (no thermals): 14.81,26.68 14.66,26.83 14.66,27.03 14.61,27.08 14.61,29.11 13.59,29.11 13.59,27.08 13.34,26.83 13.34,26.29 14.81,26.29
SXB_N
  Top 0.254: U5.11 20.16,33.97 21.42,32.71 21.42,31.26 22.64,30.04 22.64,27.64 21.9,26.9 21.23,26.9 SH2.1
SXB_P
  Top 0.254: U5.12 20.28,34.47 21.83,32.92 21.83,31.42 23.04,30.21 23.04,27.47 22.07,26.49 21.5,26.49 20.5,25.49 RB.2
  Top 0.305: 19.37,23.11 Q4.3
  pour Top (isolate 0.5, no thermals): 22.36,26.11 19.64,26.11 19.64,24.73 18.94,24.03 18.94,22.94 22.36,22.94
SXC_N
  Top 0.254: U5.20 20.06,38.47 20.11,38.42 23.4,38.42 27.23,34.6 34.52,34.6 37.05,32.07 37.05,29.65 36.02,28.62 36.02,27.74 37.02,27.74 SH3.1
SXC_P  (1 unrouted)
  Top 0.254: U5.19 20.06,37.97 20.11,38.02 23.23,38.02 27.06,34.19 34.31,34.19 36.64,31.86 36.64,29.84 35.61,28.81 35.61,27.34 36.62,27.34 36.81,27.13 37.15,27.13 37.15,26.35 RC.2
  pour Top (isolate 0.5, no thermals): 40.36,24.86 38.96,24.86 38.96,26.26 37.33,26.26 36.93,26.66 36.04,26.66 36.04,25.22 36.84,24.42 36.84,22.84 40.36,22.84
V+  (via drill 0.3)  (19 unrouted)
  Top 0.254: v10.15,32.95 9.75,32.95 C19.P$1 | v15.25,31.8 v15.26,31.8 C15.P$1 14.87,32.2 C14.P$1
  other vias: 29.95,25.2 5.8,24.95 3.25,32.4 3.27,26.84 4.85,23.05 4.75,18.65 41.25,22.85 2.1,32.4 43.95,18.65 9.65,35.75 24,24.6 24.65,25.2 24.65,24.6 25.3,25.2 25.3,24.6 25.95,25.2 25.95,24.6 26.6,25.2 26.6,24.6 27.25,25.2 27.25,24.6 27.9,25.2 27.9,24.6 29.95,24.6 30.6,25.2 30.6,24.6 31.25,25.2 31.25,24.6 31.9,25.2 31.9,24.6 32.55,24.6 33.2,24.6 38.35,31.75 38.9,32.05 39.35,31 41.8,23.15 42.3,22.85 42.8,23.15 41.75,18.75 42.25,18.5 42.75,18.75 43.95,19.45 43.95,20.25 43.95,21.05 43.95,21.8 43.95,22.55 3.85,32.4 4.45,32.4 5.05,32.4 5.65,32.4 6.25,32.4 6.85,32.4 3.77,26.48 4.27,26.84 4.77,26.48 6.3,24.6 6.8,24.95 7.3,24.6 7.8,24.95 8.3,24.6 8.8,24.95 9.3,24.6 9.8,24.95 2.1,31.65 2.1,30.9 2.1,30.15 2.1,29.4 2.1,28.65 2.1,27.9 2.1,27.15 2.1,26.4 2.1,25.65 2.1,24.9 2.1,24.15 2.1,23.4 2.1,22.65 2.1,21.9 2.1,21.15 2.1,20.4 2.1,19.65 2.1,18.9 2.1,18.15 4.2,23.05 3.55,23.05 2.9,23.05 4.1,18.65 3.45,18.65 2.8,18.65 9.95,35.2 9.6,34.65 10,34.2 9.55,33.75 10.15,33.55 5.3,24.6 4.7,24.95 4.1,24.95 3.5,24.95 2.9,24.95 39.65,26.45 40.4,26.45 41.15,26.45 32.9,31.6 32.9,30.9 24.15,33 24.02,31.19 25.6,30.75 24.02,30.61
  pour Route15 (isolate 0.5, no thermals): 45.73,30.68 40.18,30.68 40.18,33.58 23.17,33.58 23.17,30.63 18.58,30.63 18.58,38.78 10,38.78 8.1,36.88 6.5,36.88 4.45,38.93 0.37,38.93 0.37,0.37 45.73,0.37
  pour Top (no thermals): 28.36,26.56 23.64,26.56 23.64,23.04 28.36,23.04
  pour Top (isolate 0.3, no thermals): 34.36,26.56 29.64,26.56 29.64,23.04 34.36,23.04
  pour Top (isolate 0.5, no thermals): 10.36,26.66 5.64,26.66 5.64,23.04 10.36,23.04
  pour Top (isolate 0.5, no thermals): 5.46,27.16 0.14,27.16 0.14,22.64 5.46,22.64
  pour Top (no thermals): 7.16,26.66 5.29,26.66 5.29,19.44 7.16,19.44
  pour Bottom (isolate 0.5, rank 2, no thermals): 42.81,25.56 3.44,25.56 3.44,17.64 42.81,17.64
  pour Top (no thermals): 7.41,33.58 7.28,33.71 0.19,33.71 0.19,31.94 7.41,31.94
  pour Top (isolate 0.5, no thermals): 5.06,19.24 7.06,19.24 7.06,20.31 0.14,20.31 0.14,18.14 5.06,18.14
  pour Top (isolate 0.5, no thermals): 2.76,33.91 0.24,33.91 0.24,17.69 2.76,17.69
  pour Top (isolate 0.5, no thermals): 39.51,32.41 36.99,32.41 36.99,30.69 39.51,30.69
  pour Top (isolate 0.5, no thermals): 45.51,24.11 40.94,24.11 40.94,22.69 45.51,22.69
  pour Top (isolate 0.5, no thermals): 45.51,20.11 40.94,20.11 40.94,18.24 45.51,18.24
  pour Top (isolate 0.5, no thermals): 45.81,26.91 41.84,26.91 41.84,26.02 43.44,24.42 43.44,17.89 45.81,17.89
  pour Top (isolate 0.5, no thermals): 10.23,36.03 8.72,36.03 8.72,33.87 10.23,33.87
  pour Top (no thermals): 10.43,34.28 9.02,34.28 8.87,34.13 8.87,32.62 10.43,32.62
  pour Top (no thermals): 10.03,35.93 8.97,36.99 8.97,37.43 8.14,37.43 8.14,36.67 8.57,36.23 8.57,35.77 8.67,35.67 10.03,35.67
  pour Bottom (isolate 0.4, no thermals): 26.29,17.15 23.78,19.66 6.14,19.66 6.14,18.15 6.09,15.59 11.17,15.64 14.29,12.52 14.29,11.54 26.29,11.54
  pour Bottom (isolate 0.4, no thermals): 38.81,13.97 41.11,16.27 41.11,19.21 38.75,19.26 23.76,19.26 23.99,12.29 31.24,12.29 31.24,11.54 38.81,11.54
  pour Top (isolate 0.5, no thermals): 41.36,27.66 39.24,27.66 39.24,25.14 41.36,25.14
  pour Top (isolate 0.3, rank 2, no thermals): 34.06,30.88 32.78,32.16 31.64,32.16 31.64,30.39 34.06,30.39
  pour Top (no thermals): 15.41,32.62 15.71,32.92 15.71,33.02 15.76,33.07 15.76,33.66 14.94,33.66 14.94,32.83 14.59,32.48 14.59,31.69 15.41,31.69
  pour Top (rank 2, no thermals): 10.74,26.31 11.61,27.17 11.61,27.67 11.66,27.72 11.66,29.18 11.58,29.26 10.66,29.26 10.63,29.19 10.74,29.07 10.74,27.68 9.87,26.81 8.67,26.81 8.54,26.68 8.54,25.44 9.88,25.44
  pour Top (no thermals): 26.01,30.68 25.43,31.26 25.31,31.26 25.31,32.18 24.23,33.26 23.89,33.26 23.89,30.49 26.01,30.49
V-  (via drill 0.25, 0.3, 1)  (2 unrouted)
  Top 0.127: RC.1 37.55,28.3 37.12,28.3 SH3.2
  Top 0.216: U5.39 15.6,34.47
  Top 0.254: C19.P$2 8.15,33.45 v7.85,33.45 | U5.PAD U5.P14 | 15.6,34.47 U5.P8 | SH2.2 20.5,27.89 RB.1 | v16.55,27.25 16.76,27.04 RA.1 16.46,26.07 16.46,26.24 SH1.2
  Top 0.305: R10.P$2 C55.P$2 7.6,9.1 v7.35,8.85
  Top 0.381: D5.2 18.05,26.45 v17.85,26.65 | D6.2 37.55,28.3
  other vias: 17.85,27.25 3.25,31.35 4.7,21.8 4.75,17.4 37.8,33.1 41.3,21.8 14.25,31.18 11.1,32.85 24.25,29.62 30.25,30 7.8,34.7 7.8,35.35 6.3,34.7 6.3,35.35 17.2,27.25 17.85,25.35 17.85,26 17.2,27.85 17.85,27.85 20.35,26.9 19.75,26.9 20.5,29.25 21.1,29.25 39.05,29.4 38.75,29.9 37.7,29.4 38.4,29.4 38.05,27.15 38.7,27.15 24.72,29.95 25.16,29.6 25.6,29.95 26.05,29.6 24.25,27.65 24.7,28.1 25.15,27.65 25.6,28.1 26.05,27.65 26.5,28.1 26.95,27.65 27.4,28.1 27.85,27.65 38.45,33.1 41.95,21.8 42.6,21.8 41.7,17.35 42.2,17.65 42.7,17.35 30.75,28.1 31.1,27.65 31.5,28.1 31.95,27.65 32.45,28.1 30.75,29.6 31.3,30 31.8,29.6 32.35,30 9.8,29.5 9.35,29.95 8.9,29.5 8.45,29.95 8.05,29.5 9.4,27.9 8.85,27.65 8.25,27.9 7.7,27.65 7.15,27.9 6.6,27.65 6.05,27.9 5.5,27.65 4.95,27.9 4.4,27.7 3.85,27.9 3.3,27.65 3.8,31.05 4.35,31.35 4.9,31.05 5.45,31.35 6,31.05 6.55,31.35 7.1,31.05 7.65,31.35 4.1,21.8 3.5,21.8 4.15,17.4 3.5,17.4 38.05,29.9 8,34.1 39.6,29.25 41.05,29.25 40.3,29.25 37.1,34.05 30.1,31.65 30.1,30.9 30.8,31.65 30.8,30.9 11.7,32.85 11.11,34.44 11.1,35.85 8.9,31.4 9.65,31.4 8.9,30.7 9.65,30.7 13.65,31.18 13.05,31.18 28.95,35.55 28,35.55 27.35,35.55 30.05,35.55 31.05,35.55 31.7,35.55 32.45,35.55 33.15,35.55 21.5,29.9 21.75,29.25 21.9,28.7 21.9,28.1 26.8,31.9 41.2,17.65
  pour Route2 (isolate 0.5, no thermals): 45.58,30.98 40.33,30.98 40.33,34.43 36.98,34.43 36.01,33.39 35.85,33.23 33.23,35.8 33.07,35.73 33.07,35.73 26.32,35.73 26.32,30.53 22.4,30.53 18.73,34.2 18.73,38.88 9.75,38.88 7.85,36.98 6.7,36.98 4.65,39.03 0.37,39.03 0.37,0.37 45.58,0.37
  pour Top (isolate 0.5, rank 2, no thermals): 39.01,30.16 36.94,30.16 36.94,26.54 39.01,26.54
  pour Top (isolate 0.5, rank 3, no thermals): 10.86,30.26 5.74,30.26 5.74,27.34 10.86,27.34
  pour Top (isolate 0.5, no thermals): 28.26,30.31 23.94,30.31 23.94,27.24 28.26,27.24
  pour Top (isolate 0.4, no thermals): 33.06,30.31 29.79,30.31 29.79,27.24 33.06,27.24
  pour Bottom (isolate 0.3, no thermals): 43.46,31.86 1.74,31.86 1.74,26.64 43.46,26.64
  pour Top (no thermals): 7.96,31.66 2.99,31.66 2.99,27.34 7.96,27.34
  pour Top (isolate 0.5, no thermals): 5.01,22.46 2.99,22.46 2.99,20.59 5.01,20.59
  pour Top (isolate 0.5, no thermals): 5.06,17.96 3.19,17.96 3.19,16.14 5.06,16.14
  pour Top (isolate 0.5, no thermals): 39.31,34.36 36.54,34.36 36.54,32.59 39.31,32.59
  pour Top (isolate 0.5, no thermals): 42.91,22.41 40.94,22.41 40.94,20.59 42.91,20.59
  pour Top (no thermals): 43.06,17.91 40.94,17.91 40.94,15.99 43.06,15.99
  pour Top (isolate 0.5, no thermals): 8.33,36.03 6.57,36.03 5.92,35.38 5.92,34.27 8.33,34.27
  pour Top (no thermals): 8.68,33.63 8.38,33.93 8.38,34.48 8.28,34.58 6.87,34.58 6.87,33.87 7.52,33.87 7.57,33.82 7.57,33.22 7.67,33.12 8.68,33.12
  pour Top (isolate 0.5, no thermals): 18.26,25.17 18.26,28.16 16.06,28.16 15.79,27.87 15.78,27.08 15.99,26.87 15.99,24.64 17.73,24.64
  pour Top (isolate 0.5, no thermals): 20.76,27.39 22.46,27.39 22.46,29.79 22.08,30.17 20.15,30.17 19.45,29.34 19.19,29.08 19.19,26.29 20.76,26.29
  pour Top (isolate 0.5, no thermals): 41.61,30.06 38.84,30.06 38.84,27.89 41.61,27.89
  pour Top (isolate 0.3, no thermals): 31.21,32.26 26.54,32.26 26.54,31.82 28.27,30.09 31.21,30.09
  pour Bottom (isolate 0.3, rank 2, no thermals): 20.61,39.28 19.98,39.91 9.29,39.91 9.29,29.04 20.61,29.04
  pour Top (isolate 0.3, no thermals): 12.21,32.98 11.66,33.53 11.66,36.21 10.74,36.21 10.74,31.99 12.21,31.99
  pour Top (isolate 0.5, no thermals): 10.01,32.41 8.24,32.41 8.24,30.09 10.01,30.09
  pour Bottom (no thermals): 39.56,34.41 34.63,34.41 33.18,35.86 21.88,35.86 20.11,37.62 20.04,37.59 20.04,33.24 24.62,33.24 25.39,32.47 25.39,31.59 39.56,31.59
  pour Bottom (isolate 0.5, no thermals): 18.41,28.01 17.34,28.01 17.34,24.94 18.41,24.94
  pour Top (no thermals): 15.21,30.97 15.21,31.23 15.03,31.41 12.74,31.41 12.74,30.89 15.13,30.89
VSW
  pour Top (no thermals): 6.28,36.32 6.98,36.32 6.98,36.93 3.07,36.93 3.07,35.52 5.48,35.52

## Text on the board
tPlace: SER | R | T | G | TEMP | DBG | 1 | 3V | 3 | 2 | MOT | SPI | DAC | 3 | 2 | 1 | G | C | K | MO | MI | moteus r4.11 | (c) 2022 | A | B | C | CAN | L | H | G
tNames: G | 3
bNames: 3 | C | G | K | I | O | G | L | H | G | L | H